# EAGLE board ShiftRegister32 (EAGLE 6.4)

Size 50.8 x 34.29 mm. Coordinates in mm from the lower left corner, seen from the top.
Outline: 0,34.29 0,0 50.8,0 50.8,34.29 0,34.29
Copper layers (1*16): Top 0.0356mm / dielectric 1.5011mm / Bottom 0.0356mm
Design rules "LaenPCBOrder": minimum track width 6mil, minimum drill 13mil, track to track 6mil, track to pad 6mil, pad to pad 6mil, via to via 6mil, smd to smd 6mil, copper to edge 15mil, drill to drill 6mil, minimum pad ring 7mil, minimum via ring 7mil, stop-mask expansion 4mil, vias tented up to drill 0mil, thermal gap 10mil

## Footprints (pad centres in the part's own frame; a part is rotated, then mirrored left to right if it is on the bottom)
DIL16 = drill 0.813 long: 1 -8.89,-3.81; 2 -6.35,-3.81; 3 -3.81,-3.81; 4 -1.27,-3.81; 5 1.27,-3.81; 6 3.81,-3.81; 7 6.35,-3.81; 8 8.89,-3.81; 9 8.89,3.81; 10 6.35,3.81; 11 3.81,3.81; 12 1.27,3.81; 13 -1.27,3.81; 14 -3.81,3.81; 15 -6.35,3.81; 16 -8.89,3.81
1,6/0,8 = drill 0.813 pad 1.6 octagon: 1 0,0
2,8 = hole 2.8: 0,0

## Placement (x,y rotation side)
E$1  74HC595  [DIL16]  9.4,15.75 270 top
E$2  74HC595  [DIL16]  20.07,17.02 270 top
E$3  74HC595  [DIL16]  30.73,17.02 270 top
E$4  74HC595  [DIL16]  41.4,18.29 270 top
E$5  [1,6/0,8]  2.03,1.27 0 top
E$6  [1,6/0,8]  2.03,4.06 0 top
E$7  [1,6/0,8]  4.57,4.06 0 top
E$8  [1,6/0,8]  7.11,4.06 0 top
E$9  [1,6/0,8]  9.65,4.06 0 top
E$10  [1,6/0,8]  12.19,4.06 0 top
E$11  [1,6/0,8]  14.73,4.06 0 top
E$12  [1,6/0,8]  17.27,4.06 0 top
E$13  [1,6/0,8]  19.81,4.06 0 top
E$14  [1,6/0,8]  22.35,4.06 0 top
E$15  [1,6/0,8]  24.89,4.06 0 top
E$16  [1,6/0,8]  27.43,4.06 0 top
E$17  [1,6/0,8]  29.97,4.06 0 top
E$18  [1,6/0,8]  32.51,4.06 0 top
E$19  [1,6/0,8]  35.05,4.06 0 top
E$20  [1,6/0,8]  37.59,4.06 0 top
E$21  [1,6/0,8]  40.13,4.06 0 top
E$22  [1,6/0,8]  4.57,1.27 0 top
E$23  [1,6/0,8]  7.11,1.27 0 top
E$24  [1,6/0,8]  9.65,1.27 0 top
E$25  [1,6/0,8]  12.19,1.27 0 top
E$26  [1,6/0,8]  14.73,1.27 0 top
E$27  [1,6/0,8]  17.27,1.27 0 top
E$28  [1,6/0,8]  19.81,1.27 0 top
E$29  [1,6/0,8]  22.35,1.27 0 top
E$30  [1,6/0,8]  24.89,1.27 0 top
E$31  [1,6/0,8]  27.43,1.27 0 top
E$32  [1,6/0,8]  29.97,1.27 0 top
E$33  [1,6/0,8]  32.51,1.27 0 top
E$34  [1,6/0,8]  35.05,1.27 0 top
E$35  [1,6/0,8]  37.59,1.27 0 top
E$36  [1,6/0,8]  40.13,1.27 0 top
E$37  [1,6/0,8]  13.97,32 0 top
E$38  [1,6/0,8]  16.51,32 0 top
E$39  [1,6/0,8]  19.05,32 0 top
E$40  [2,8]  5.08,29.21 0 top
E$41  [1,6/0,8]  21.59,32 0 top
E$42  [2,8]  45.72,5.08 0 top
E$43  [1,6/0,8]  24.13,32 0 top
E$44  [1,6/0,8]  29.21,28.96 0 top
E$45  [1,6/0,8]  16.51,28.96 0 top
E$46  [1,6/0,8]  26.67,32 0 top
E$47  [1,6/0,8]  29.21,32 0 top
E$48  [1,6/0,8]  31.75,32 0 top
E$49  [1,6/0,8]  34.29,32 0 top
E$50  [1,6/0,8]  36.83,32 0 top
E$51  [1,6/0,8]  13.97,28.96 0 top
E$52  [1,6/0,8]  31.75,28.96 0 top
E$53  [1,6/0,8]  21.59,28.96 0 top
E$54  [1,6/0,8]  19.05,28.96 0 top
E$55  [1,6/0,8]  34.29,28.96 0 top
E$56  [1,6/0,8]  36.83,28.96 0 top

## Library data of the parts
E$1-E$4 = 40xx
E$5-E$39 E$41 E$43-E$56 = wirepad
E$40 E$42 = holes

## Nets
S$1: E$1.8 E$2.8 E$3.8 E$4.8 E$37.1 E$46.1
S$2: E$1.13 E$51.1
S$3: E$1.11 E$2.11 E$3.11 E$4.11 E$38.1 E$47.1
S$4: E$1.12 E$2.12 E$3.12 E$4.12 E$39.1 E$48.1
S$5: E$1.14 E$41.1
S$6: E$1.9 E$2.14
S$7: E$2.9 E$3.14
S$8: E$3.9 E$4.14
S$9: E$1.16 E$2.16 E$3.16 E$4.16 E$43.1 E$50.1
S$10: E$4.9 E$49.1
S$11: E$2.13 E$45.1
S$12: E$3.13 E$54.1
S$13: E$4.13 E$53.1
S$14: E$1.10 E$44.1
S$15: E$2.10 E$52.1
S$16: E$3.10 E$55.1
S$17: E$4.10 E$56.1
S$18: E$1.15 E$6.1
S$19: E$2.15 E$14.1
S$20: E$3.15 E$5.1
S$21: E$4.15 E$29.1
S$22: E$1.1 E$7.1
S$23: E$1.2 E$8.1
S$24: E$1.3 E$9.1
S$25: E$1.4 E$10.1
S$26: E$1.5 E$11.1
S$27: E$1.6 E$12.1
S$28: E$1.7 E$13.1
S$29: E$2.1 E$15.1
S$30: E$2.2 E$16.1
S$31: E$2.3 E$17.1
S$32: E$2.4 E$18.1
S$33: E$2.5 E$19.1
S$34: E$2.6 E$20.1
S$35: E$2.7 E$21.1
S$36: E$3.1 E$22.1
S$37: E$3.2 E$23.1
S$38: E$3.3 E$24.1
S$39: E$3.4 E$25.1
S$40: E$3.5 E$26.1
S$41: E$3.6 E$27.1
S$42: E$3.7 E$28.1
S$43: E$4.1 E$30.1
S$44: E$4.2 E$31.1
S$45: E$4.3 E$32.1
S$46: E$4.4 E$33.1
S$47: E$4.5 E$34.1
S$48: E$4.6 E$35.1
S$49: E$4.7 E$36.1

## Tracks (layer width: path | path; a pad name or v marks a point on that pad's centre or on a via)
S$1  (5 unrouted)
S$2  (1 unrouted)
S$3  (5 unrouted)
S$4  (5 unrouted)
S$5  (1 unrouted)
S$6  (1 unrouted)
S$7  (1 unrouted)
S$8  (1 unrouted)
S$9  (5 unrouted)
S$10  (1 unrouted)
S$11  (1 unrouted)
S$12  (1 unrouted)
S$13  (1 unrouted)
S$14  (1 unrouted)
S$15  (1 unrouted)
S$16  (1 unrouted)
S$17  (1 unrouted)
S$18  (1 unrouted)
S$19  (1 unrouted)
S$20  (1 unrouted)
S$21  (1 unrouted)
S$22  (1 unrouted)
S$23  (1 unrouted)
S$24  (1 unrouted)
S$25  (1 unrouted)
S$26  (1 unrouted)
S$27  (1 unrouted)
S$28  (1 unrouted)
S$29  (1 unrouted)
S$30  (1 unrouted)
S$31  (1 unrouted)
S$32  (1 unrouted)
S$33  (1 unrouted)
S$34  (1 unrouted)
S$35  (1 unrouted)
S$36  (1 unrouted)
S$37  (1 unrouted)
S$38  (1 unrouted)
S$39  (1 unrouted)
S$40  (1 unrouted)
S$41  (1 unrouted)
S$42  (1 unrouted)
S$43  (1 unrouted)
S$44  (1 unrouted)
S$45  (1 unrouted)
S$46  (1 unrouted)
S$47  (1 unrouted)
S$48  (1 unrouted)
S$49  (1 unrouted)

## Text on the board
tNames: Shift Register Bank | GND | SHCP | STCP | DSI | VCC | GND | SHCP | STCP | DSO | VCC | ____ | ____ | ____ | ____ | ____ | ____ | ____ | ____ | OE0 | OE1 | OE2 | OE3 | MR0 | MR1 | MR2 | MR3 | 0 | 1 | 2 | 3 | 4 | 5 | 6 | 7 | 8 | 9 | 10 | 11 | 12 | 13 | 14 | 15 | 16 | 17 | 18 | 19 | 20 | 21 | 22 | 23 | 24 | 25 | 26 | 27 | 28 | 29 | 30 | 31 | Brent M. Spell